# EAGLE board Light Sensor V3 (EAGLE 8.6.0)
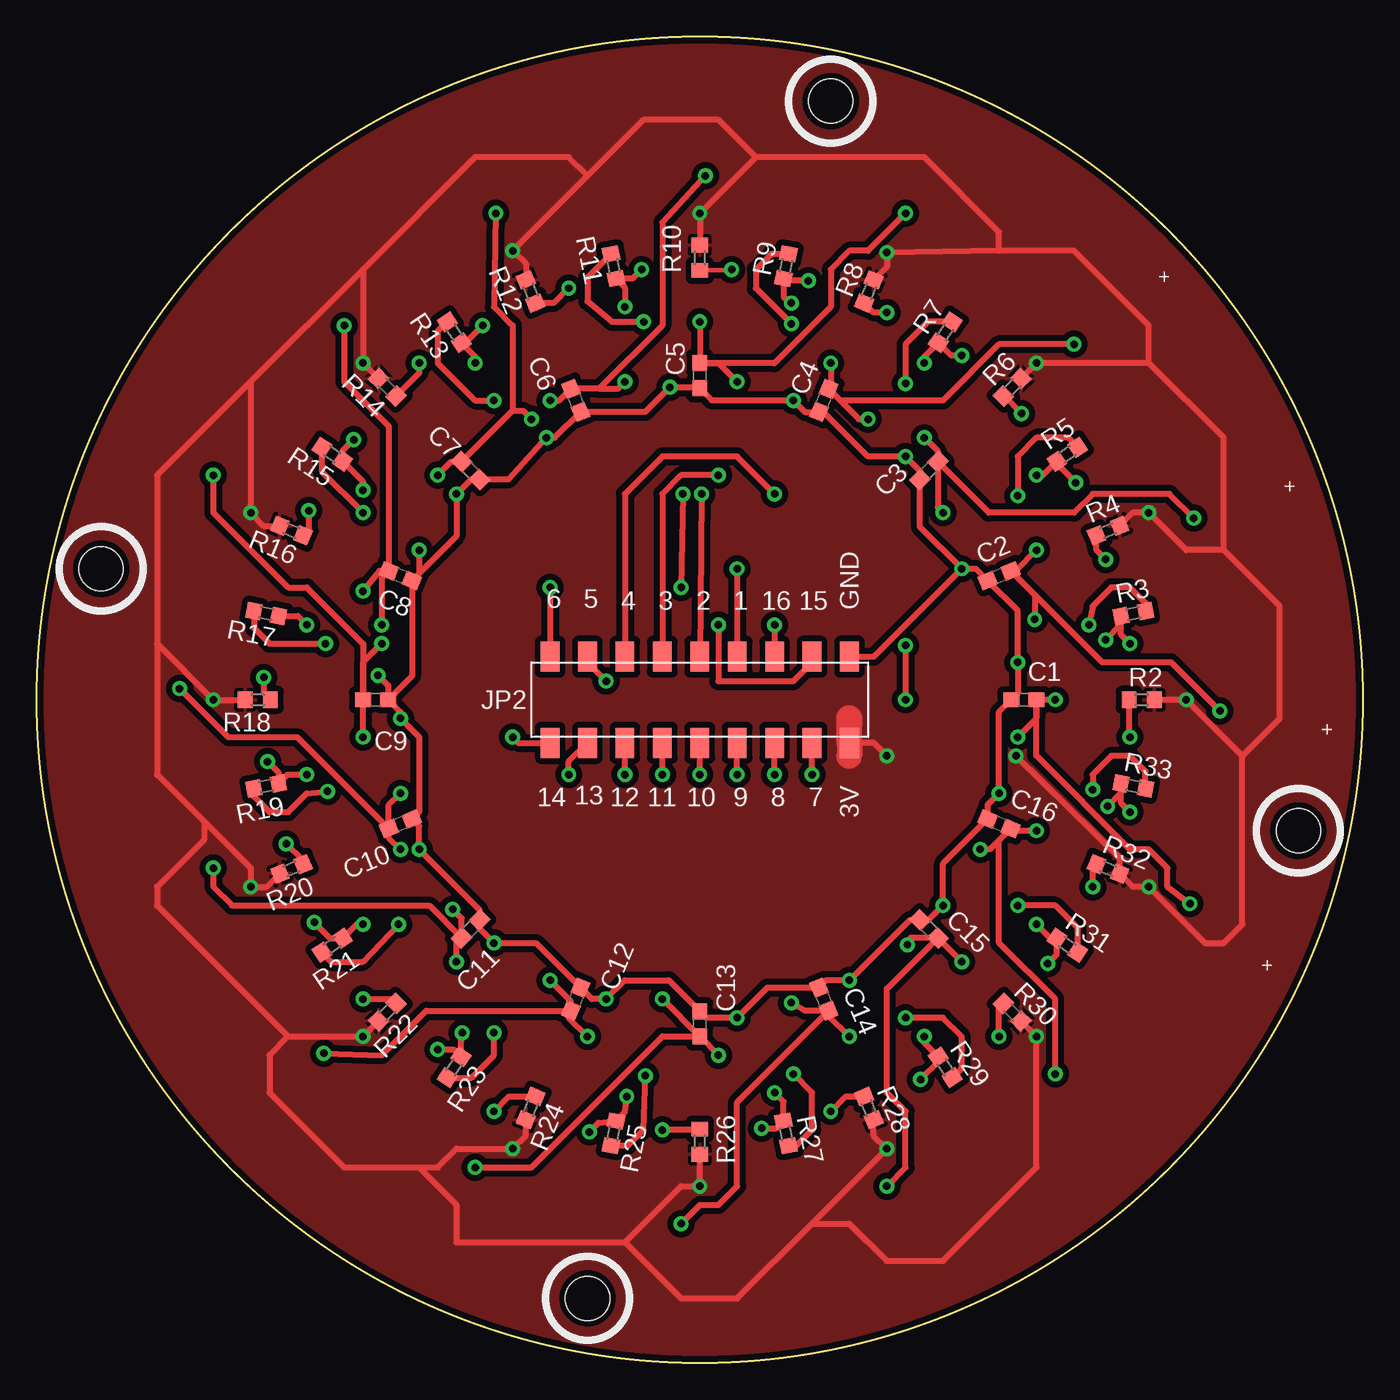
[diagram p0: board, top side]
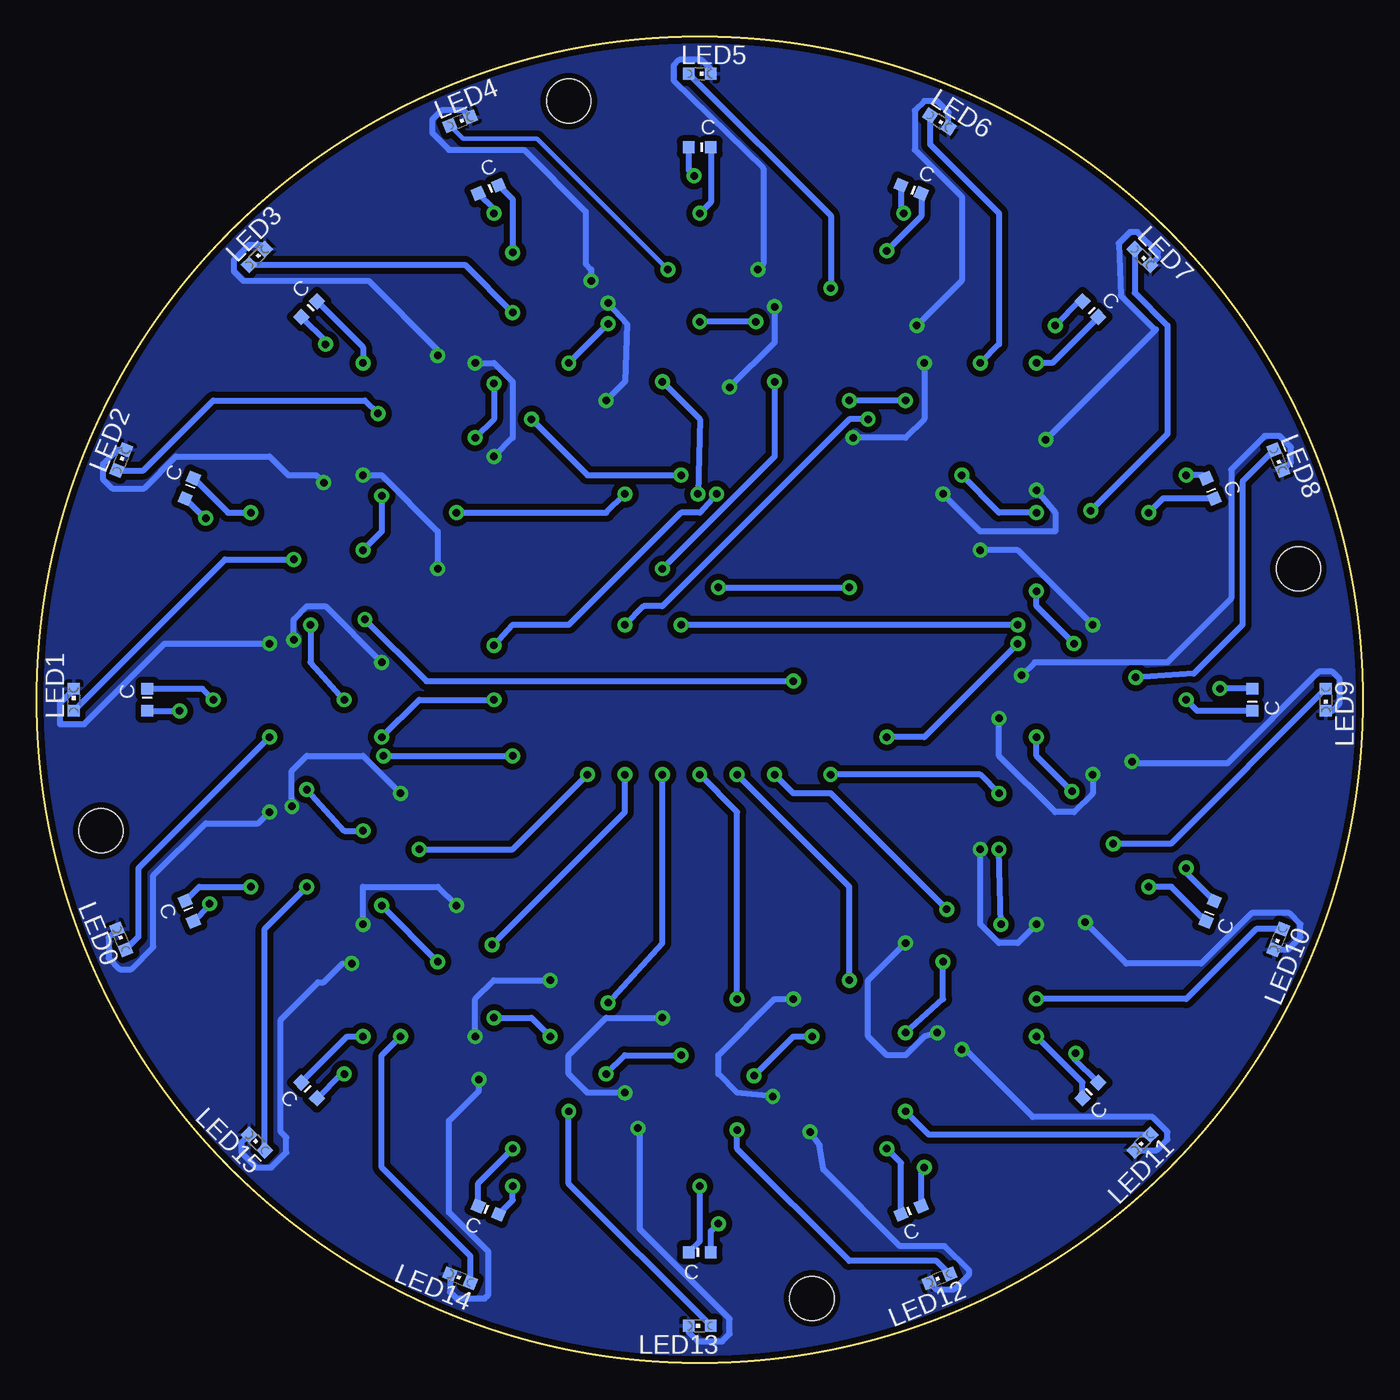
[diagram p1: board, bottom side, seen from below]

Size 90 x 90 mm. Coordinates in mm from the lower left corner, seen from the top.
Outline: circle at 45,45 radius 45
Copper layers (1*16): Top 0.035mm / dielectric 1.5mm / Bottom 0.035mm
Design rules "SparkFun": minimum track width 8mil, minimum drill 20mil, track to track 8mil, track to pad 8mil, pad to pad 8mil, via to via 8mil, smd to smd 8mil, copper to edge 10mil, drill to drill 8mil, minimum pad ring 12mil, minimum via ring 10mil, stop-mask expansion 4mil, vias tented up to drill 25mil, thermal gap 10mil
Holes 3 mm at 85.64,36.11 53.89,85.64 37.38,4.36 4.36,53.89

## Footprints (pad centres in the part's own frame; a part is rotated, then mirrored left to right if it is on the bottom)
C0603 = smd 1.1 x 1: 1 -0.85,0; 2 0.85,0
2X09_SMT = smd 1.27 x 2.032: 1 -10.16,-2.921; 2 -10.16,2.921; 3 -7.62,-2.921; 4 -7.62,2.921; 5 -5.08,-2.921; 6 -5.08,2.921; 7 -2.54,-2.921; 8 -2.54,2.921; 9 0,-2.921; 10 0,2.921; 11 2.54,-2.921; 12 2.54,2.921; 13 5.08,-2.921; 14 5.08,2.921; 15 7.62,-2.921; 16 7.62,2.921; 17 10.16,-2.921; 18 10.16,2.921
CHIPLED_0603 = smd 0.8 x 0.8: A 0,-0.75; C 0,0.75
SMD = smd 0.8 x 0.8: C -0.75,0; E 0.75,0
R0603 = smd 1 x 1.1: 1 -0.85,0; 2 0.85,0

## Placement (x,y rotation side)
C1  0.1uF  [C0603]  67,45 0 top
C2  0.1uF  [C0603]  65.33,53.42 22.5 top
C3  0.1uF  [C0603]  60.56,60.56 45 top
C4  0.1uF  [C0603]  53.42,65.33 67.5 top
C5  0.1uF  [C0603]  45,67 90 top
C6  0.1uF  [C0603]  36.58,65.33 112.5 top
C7  0.1uF  [C0603]  29.44,60.56 135 top
C8  0.1uF  [C0603]  24.67,53.42 157.5 top
C9  0.1uF  [C0603]  23,45 180 top
C10  0.1uF  [C0603]  24.67,36.58 202.5 top
C11  0.1uF  [C0603]  29.44,29.44 225 top
C12  0.1uF  [C0603]  36.58,24.67 247.5 top
C13  0.1uF  [C0603]  45,23 270 top
C14  0.1uF  [C0603]  53.42,24.67 292.5 top
C15  0.1uF  [C0603]  60.56,29.44 315 top
C16  0.1uF  [C0603]  65.33,36.58 337.5 top
JP2  [2X09_SMT]  45,45 0 top
LED0  [CHIPLED_0603]  84.26,28.74 22.5 bottom
LED1  [CHIPLED_0603]  87.5,45 0 bottom
LED2  [CHIPLED_0603]  84.26,61.26 337.5 bottom
LED3  [CHIPLED_0603]  75.05,75.05 315 bottom
LED4  [CHIPLED_0603]  61.26,84.26 292.5 bottom
LED5  [CHIPLED_0603]  45,87.5 270 bottom
LED6  [CHIPLED_0603]  28.74,84.26 237 bottom
LED7  [CHIPLED_0603]  14.95,75.05 224.5 bottom
LED8  [CHIPLED_0603]  5.74,61.26 202.5 bottom
LED9  [CHIPLED_0603]  2.5,45 180 bottom
LED10  [CHIPLED_0603]  5.74,28.74 157.5 bottom
LED11  [CHIPLED_0603]  14.95,14.95 135 bottom
LED12  [CHIPLED_0603]  28.74,5.74 112.5 bottom
LED13  [CHIPLED_0603]  45,2.5 90 bottom
LED14  [CHIPLED_0603]  61.26,5.74 67.5 bottom
LED15  [CHIPLED_0603]  75.05,14.95 45 bottom
LS0  ALS  [SMD]  79.65,30.65 292.5 bottom
LS1  ALS  [SMD]  82.5,45 270 bottom
LS2  ALS  [SMD]  79.65,59.35 247.5 bottom
LS3  ALS  [SMD]  71.52,71.52 225 bottom
LS4  ALS  [SMD]  59.35,79.65 202.5 bottom
LS5  ALS  [SMD]  45,82.5 180 bottom
LS6  ALS  [SMD]  30.65,79.65 157.5 bottom
LS7  ALS  [SMD]  18.48,71.52 135 bottom
LS8  ALS  [SMD]  10.35,59.35 112.5 bottom
LS9  ALS  [SMD]  7.5,45 90 bottom
LS10  ALS  [SMD]  10.35,30.65 67.5 bottom
LS11  ALS  [SMD]  18.48,18.48 45 bottom
LS12  ALS  [SMD]  30.65,10.35 22.5 bottom
LS13  ALS  [SMD]  45,7.5 0 bottom
LS14  ALS  [SMD]  59.35,10.35 337.5 bottom
LS15  ALS  [SMD]  71.52,18.48 315 bottom
R2  100  [R0603]  75,45 0 top
R3  33K  [R0603]  74.42,50.85 11.3 top
R4  100  [R0603]  72.72,56.48 22.5 top
R5  33K  [R0603]  69.94,61.67 33.8 top
R6  100  [R0603]  66.21,66.21 45 top
R7  33K  [R0603]  61.67,69.94 56.3 top
R8  100  [R0603]  56.48,72.72 67.5 top
R9  33K  [R0603]  50.85,74.42 78.8 top
R10  100  [R0603]  45,75 90 top
R11  33K  [R0603]  39.15,74.42 101.3 top
R12  100  [R0603]  33.52,72.72 112.5 top
R13  33K  [R0603]  28.33,69.94 123.8 top
R14  100  [R0603]  23.79,66.21 135 top
R15  33K  [R0603]  20.06,61.67 146.3 top
R16  100  [R0603]  17.28,56.48 157.5 top
R17  33K  [R0603]  15.58,50.85 168.8 top
R18  100  [R0603]  15,45 180 top
R19  33K  [R0603]  15.58,39.15 191.3 top
R20  100  [R0603]  17.28,33.52 202.5 top
R21  33K  [R0603]  20.06,28.33 213.8 top
R22  100  [R0603]  23.79,23.79 225 top
R23  33K  [R0603]  28.33,20.06 236.3 top
R24  100  [R0603]  33.52,17.28 247.5 top
R25  33K  [R0603]  39.15,15.58 258.8 top
R26  100  [R0603]  45,15 270 top
R27  33K  [R0603]  50.85,15.58 281.3 top
R28  100  [R0603]  56.48,17.28 292.5 top
R29  33K  [R0603]  61.67,20.06 303.8 top
R30  100  [R0603]  66.21,23.79 315 top
R31  33K  [R0603]  69.94,28.33 326.3 top
R32  100  [R0603]  72.72,33.52 337.5 top
R33  33K  [R0603]  74.42,39.15 348.8 top

## Library data of the parts
C1-C16 LED0 LED1-LED15 R2-R33 = adafruit
JP2 = PinHead+
LS0 LS1-LS15 = phototransitor-ALS-PT19-315CL177TR8

## Nets
+3V3: JP2.17 LS0.C LS1.C LS2.C LS3.C LS4.C LS5.C LS6.C LS7.C LS8.C LS9.C LS10.C LS11.C LS12.C LS13.C LS14.C LS15.C R2.2 R4.2 R6.2 R8.2 R10.2 R12.2 R14.2 R16.2 R18.2 R20.2 R22.2 R24.2 R26.2 R28.2 R30.2 R32.2
GND: C1.1 C2.1 C3.1 C4.1 C5.1 C6.1 C7.1 C8.1 C9.1 C10.1 C11.1 C12.1 C13.1 C14.1 C15.1 C16.1 JP2.18 LED0.C LED1.C LED2.C LED3.C LED4.C LED5.C LED6.C LED7.C LED8.C LED9.C LED10.C LED11.C LED12.C LED13.C LED14.C LED15.C R3.1 R5.1 R7.1 R9.1 R11.1 R13.1 R15.1 R17.1 R19.1 R21.1 R23.1 R25.1 R27.1 R29.1 R31.1 R33.1
LS0: C1.2 JP2.2 LS0.E R3.2
LS1: C2.2 JP2.4 LS1.E R5.2
LS2: C3.2 JP2.6 LS2.E R7.2
LS3: C4.2 JP2.8 LS3.E R9.2
LS4: C5.2 JP2.10 LS4.E R11.2
LS5: C6.2 JP2.12 LS5.E R13.2
LS6: C7.2 JP2.14 LS6.E R15.2
LS7: C8.2 JP2.16 LS7.E R17.2
LS8: C9.2 JP2.1 LS8.E R19.2
LS9: C10.2 JP2.3 LS9.E R21.2
LS10: C11.2 JP2.5 LS10.E R23.2
LS11: C12.2 JP2.7 LS11.E R25.2
LS12: C13.2 JP2.9 LS12.E R27.2
LS13: C14.2 JP2.11 LS13.E R29.2
LS14: C15.2 JP2.13 LS14.E R31.2
LS15: C16.2 JP2.15 LS15.E R33.2
N$1: LED0.A R2.1
N$2: LED1.A R4.1
N$3: LED2.A R6.1
N$4: LED3.A R8.1
N$5: LED4.A R10.1
N$6: LED5.A R12.1
N$7: LED6.A R14.1
N$8: LED7.A R16.1
N$9: LED8.A R18.1
N$10: LED9.A R20.1
N$11: LED10.A R22.1
N$12: LED11.A R24.1
N$13: LED12.A R26.1
N$14: LED13.A R28.1
N$15: LED14.A R30.1
N$16: LED15.A R32.1

## Tracks (layer width: path | path; a pad name or v marks a point on that pad's centre or on a via)
+3V3  (via drill 0.51)
  Top 0.406: R10.2 v45,78.02 48.81,81.83 | R8.2 57.7,74.4 v57.7,75.35 65.32,75.48 | R6.2 v67.86,67.86 75.48,67.86 | R4.2 74.4,57.7 v75.48,57.7 78.02,55.16 80.56,55.16 | R2.2 v78.02,45 81.83,41.19 | R30.2 v67.86,22.14 67.86,13.25 61.51,6.9 57.7,6.9 55.16,9.44 52.62,9.44 | R28.2 56.81,15.41 v57.7,14.52 52.62,9.44 | R26.2 v45,11.98 43.73,11.98 39.92,8.17 | R24.2 33.19,15.41 v32.3,14.52 28.49,14.52 27.22,13.25 25.95,13.25 | R22.2 v22.14,22.14 17.06,22.14 | R20.2 15.6,32.3 v14.52,32.3 14.52,33.57 11.34,36.74 | R18.2 v11.98,45 8.17,48.81 | R16.2 15.41,56.81 v14.52,57.7 14.52,66.59 | R14.2 v22.14,67.86 22.14,74.21 | R12.2 33.19,74.59 v32.3,75.48 37.38,80.56 | v57.7,41.19 56.81,42.08 JP2.17 | v66.46,41.19 73.5,34.28 R32.2 74.4,32.3 v75.48,32.3 79.29,28.49 80.56,28.49 81.83,29.76 81.83,41.19 | 81.83,41.19 84.37,43.73 84.37,51.35 80.56,55.16 | 80.56,55.16 80.56,62.78 75.48,67.86 | 75.48,67.86 75.48,70.4 70.4,75.48 65.32,75.48 | 65.32,75.48 65.32,76.75 60.24,81.83 48.81,81.83 | 48.81,81.83 46.27,84.37 41.19,84.37 37.38,80.56 | 37.38,80.56 36.11,81.83 29.76,81.83 22.14,74.21 | 22.14,74.21 14.52,66.59 | 14.52,66.59 8.17,60.24 8.17,48.81 | 8.17,48.81 8.17,39.92 11.34,36.74 | 11.34,36.74 11.34,35.48 8.17,32.3 8.17,31.03 17.06,22.14 | 17.06,22.14 15.79,20.87 15.79,18.33 20.87,13.25 25.95,13.25 | 25.95,13.25 28.49,10.71 28.49,8.17 39.92,8.17 | 39.92,8.17 43.73,4.36 47.54,4.36 52.62,9.44
  Top 1.778: 55.16,41.19 JP2.17 55.16,43.73
  Bottom 0.406: LS5.C 44.25,78.77 v45,78.02 | LS4.C 57.7,78.97 v57.7,75.35 | LS3.C 67.86,68.92 v67.86,67.86 | LS2.C 77.02,57.7 v75.48,57.7 | LS1.C 78.77,45.75 v78.02,45 | LS0.C 78.97,32.3 v75.48,32.3 | LS15.C 68.92,22.14 v67.86,22.14 | LS14.C 60.04,12.18 v57.7,14.52 | LS13.C 45,8.25 v45,11.98 | LS12.C 31.34,13.56 v32.3,14.52 | LS11.C 19.01,19.01 v22.14,22.14 | LS10.C 12.98,32.3 v14.52,32.3 | LS9.C 11.23,44.25 v11.98,45 | LS8.C 13.56,58.66 v14.52,57.7 | LS7.C 21.08,67.86 v22.14,67.86 | LS6.C 29.96,77.82 v32.3,75.48 | v66.46,41.19 v57.7,41.19
  pour Top (isolate 0.406): -13.42,90.72 -13.42,29.76 15.79,0.55 31.03,0.55 33.57,-1.99 67.86,-1.99 99.61,29.76 99.61,62.78 72.94,89.45 71.67,90.72
GND  (via drill 0.51)
  Top 0.305: 69.24,61.02 R5.1 | 50.83,73.45 R9.1 | 29.11,69.24 R13.1
  Top 0.406: v74.21,48.81 73.59,49.43 R3.1 73.59,50.09 v72.56,49.06 | v70.53,59.73 69.24,61.02 | v62.78,68.37 62.06,68.37 R7.1 60.24,68.28 v60.24,67.86 | v52.37,73.45 50.83,73.45 | v41.06,74.21 40.44,73.59 R11.1 39.92,72.98 v39.92,71.67 | v30.27,70.4 29.11,69.24 | v21.5,62.65 20.76,61.91 R15.1 22.14,59.82 v22.14,59.22 | v23.16,46.65 23.85,45.96 C9.1 | v15.66,40.81 16.41,40.06 R19.1 17.02,39.92 v18.33,39.92 | v18.84,29.89 19.92,28.81 R21.1 21.72,29.76 v22.14,29.76 | v27.22,21.25 28.32,21.25 R23.1 28.8,21.82 v28.87,22.39 | v37.51,15.66 38.13,16.28 R25.1 39.92,17.02 v40.05,18.08 | v49.19,15.92 50.19,15.92 R27.1 50.69,17.72 v50.08,18.33 | v59.99,19.22 61.19,20.43 R29.1 60.24,21.72 v60.24,22.14 | v68.62,27.09 69.24,27.71 R31.1 68.81,28.8 v67.86,29.76 | v74.21,37.38 73.59,38 R33.1 73.59,38.66 v72.69,37.76 | R9.1 50.69,72.33 v51.22,71.92 | R5.1 68.28,60.24 v67.86,60.24 | v62.78,53.89 63.74,53.89 C2.1 66.59,51.04 v66.59,47.54 66.59,45.44 C1.1 65.32,44.17 v65.32,38.65 64.54,37.87 C16.1 61.51,33.88 v61.51,31.03 60.52,30.05 C15.1 59.26,30.05 v55.16,25.95 53.58,25.95 C14.1 49.59,25.46 v47.54,23.41 45.44,23.41 C13.1 42.9,25.95 39.92,25.95 v38.65,24.68 37.69,24.68 C12.1 33.88,28.49 v31.03,28.49 30.05,29.48 C11.1 30.05,30.74 v25.95,34.84 25.95,36.42 C10.1 25.95,37.4 25.95,42.46 v24.68,43.73 24.68,44.17 C9.1 | v62.78,53.89 59.95,56.72 C3.1 59.95,60.52 v58.97,61.51 56.43,61.51 53.4,64.54 C4.1 52.13,64.54 v51.35,65.32 45.83,65.32 C5.1 44.94,66.21 v42.97,66.21 41.3,64.54 C6.1 35.15,62.78 v34.59,62.78 32.02,59.95 C7.1 29.48,59.95 v28.49,58.97 28.49,56.12 C8.1 | JP2.18 56.81,47.92 v62.78,53.89
  Top 0.406: R17.1 17.72,50.69 v18.33,50.08 | C8.1 25.95,53.58 v25.95,55.16 | C8.1 25.46,46.61 C9.1 | R13.1 29.76,68.28 v29.76,67.86
  Bottom 0.305: LED1.C 87.5,45.68 | 75.61,75.86 75.73,75.86 | LED5.C 44.25,87.81 | 13.89,75.05 13.89,75.35 | 14.14,70.15 14.01,70.15 | LED8.C 5.43,60.57 | 15.54,40.68 v15.66,40.81
  Bottom 0.406: v74.21,48.81 81.32,48.81 86.78,43.35 88.43,43.35 88.43,44.75 87.5,45.68 | LED2.C 84.56,61.96 85.51,61 85.51,59.99 84.88,59.35 82.72,59.35 80.56,61.51 74.21,61.51 72.94,60.24 71.03,60.24 v70.53,59.73 | LED3.C 74.8,75.86 75.61,75.86 76.62,74.84 76.62,74.08 75.99,73.45 67.48,73.45 62.78,68.75 v62.78,68.37 | LED4.C 61.02,85 62.53,85 63.16,84.37 63.16,83.48 62.02,82.34 56.94,82.34 52.75,78.15 52.75,74.59 52.37,74.21 v52.37,73.45 | 44.25,87.81 44.87,88.43 46.4,88.43 46.78,88.05 46.78,87.04 40.68,81.07 40.68,74.59 v41.06,74.21 | LED6.C 28.11,84.88 28.87,85.64 29.76,85.64 30.39,85 30.39,82.34 27.22,79.16 27.22,73.45 v30.27,70.4 | LED7.C 13.89,75.05 | 13.89,75.35 15.28,76.75 15.79,76.75 16.55,75.99 16.43,72.43 14.14,70.15 | 14.01,70.15 v21.5,62.65 | 5.43,60.57 4.87,61.13 4.87,62.14 5.63,62.91 6.65,62.91 8.93,60.62 8.93,51.86 13.25,47.54 22.27,47.54 v23.16,46.65 | LED9.C 2.06,44.25 1.57,44.75 1.57,46.4 2.07,46.91 2.96,46.91 9.19,40.68 15.54,40.68 | LED10.C 5.06,28.04 4.23,28.87 4.23,29.76 4.99,30.52 7.53,30.52 10.96,27.09 16.04,27.09 v18.84,29.89 | LED11.C 13.99,14.42 13.25,15.16 13.25,15.66 14.27,16.68 22.39,16.68 26.97,21.25 v27.22,21.25 | LED12.C 28.98,4.99 27.73,4.99 26.71,6.01 26.71,6.27 28.36,7.92 31.41,7.92 36.62,13.12 36.87,14.77 v37.51,15.66 | LED13.C 45.75,2.06 45.13,1.44 43.48,1.44 42.97,1.95 42.97,2.96 49.06,9.06 49.06,15.79 v49.19,15.92 | LED14.C 61.96,4.81 61.51,4.36 59.61,4.36 59.35,4.61 59.35,7.53 62.02,10.2 62.02,16.43 59.99,18.46 v59.99,19.22 | LED15.C 76.11,14.95 76.11,14.27 75.1,13.25 74.08,13.25 73.07,14.27 73.07,15.28 73.45,15.66 73.45,23.28 70.91,25.82 70.53,25.82 69.26,27.09 v68.62,27.09
  Bottom 0.406: LED0.C 85.13,28.85 85.13,27.47 84.37,26.71 83.61,26.71 82.08,28.24 82.08,33.06 78.53,36.62 74.97,36.62 v74.21,37.38 | v39.92,71.67 39.92,69.26 v42.97,66.21 | v51.22,71.92 49.95,70.53 50.08,66.59 v51.35,65.32 | v60.24,67.86 58.97,67.86 57.7,66.59 57.7,62.78 v58.97,61.51 | v67.86,60.24 66.59,60.24 62.78,56.43 v62.78,53.89 | v72.56,49.06 72.56,50.46 71.67,51.35 70.4,51.35 v66.59,47.54 | v72.69,37.76 72.69,40.17 71.67,41.19 67.86,41.19 v65.32,38.65 | v67.86,29.76 67.86,32.3 62.78,32.3 v61.51,31.03 | v60.24,22.14 60.24,24.68 58.97,25.95 v55.16,25.95 | v50.08,18.33 52.62,18.33 53.89,19.6 53.89,20.87 51.35,23.41 v47.54,23.41 | v40.05,18.08 42.46,18.33 43.73,19.6 43.73,20.87 39.92,24.68 v38.65,24.68 | v28.87,22.39 29.76,22.14 31.03,20.87 32.3,20.87 33.57,22.14 33.57,25.95 v31.03,28.49 | v22.14,29.76 23.41,28.49 24.68,28.49 25.95,29.76 v25.95,34.84 | v18.33,39.92 18.33,38.65 19.6,37.38 20.87,37.38 24.68,41.19 v24.68,43.73 | v18.33,50.08 23.41,55.16 v25.95,55.16 | v22.14,59.22 20.87,57.7 20.87,56.43 25.95,56.43 v28.49,58.97 | v34.59,62.78 31.03,62.78 29.76,64.05 v29.76,67.86
  pour Bottom (isolate 0.406): 0.55,91.99 66.59,91.99 91.99,66.59 91.99,4.36 85.64,-1.99 8.17,-1.99 -0.72,6.9 -0.72,67.86 -0.72,90.72
LS0  (via drill 0.51)
  Top 0.406: v78.27,31.16 76.75,32.3 76.75,33.57 75.48,34.84 74.21,34.84 67.85,41.2 C1.2 | R3.2 75.26,51.57 74.21,52.62 72.94,52.62 71.67,51.35 v71.42,50.08 | v69.13,45 C1.2 | C1.2 67.85,43.72 v66.59,42.46 | v34.84,52.62 JP2.2 | v43.86,58.97 v43.73,52.62 | v58.97,48.68 v58.97,45
  Bottom 0.406: LS0.E 78.28,31.03 v78.27,31.16 | v71.42,50.08 71.42,47.54 v69.13,45 | v66.59,42.46 64.05,45 v58.97,45 | v43.86,58.97 45,57.7 46.27,57.7 53.89,50.08 57.7,50.08 v58.97,48.68 | v43.73,52.62 v34.84,52.62
LS1  (via drill 0.51)
  Top 0.406: v80.31,44.24 77,47.54 72.31,47.54 C2.2 | R5.2 70.01,62.78 67.86,62.78 66.59,61.51 v66.59,58.84 | v67.86,55.16 66.44,53.74 C2.2 | C2.2 67.73,52.12 v67.73,50.46 | v38.65,46.27 37.38,47.54 JP2.4
  Bottom 0.406: LS1.E v80.32,44.25 v80.31,44.24 | v66.59,58.84 66.59,56.43 v67.86,55.16 | v67.73,50.46 63.54,46.27 v38.65,46.27
LS2  (via drill 0.51)
  Top 0.406: v78.53,57.32 76.88,58.97 71.67,58.97 70.4,57.7 64.61,57.7 C3.2 | R7.2 60.49,70.65 58.97,69.13 v58.97,66.46 | v60.24,62.78 61.16,61.86 C3.2 | C3.2 61.16,58.05 v61.51,57.7 | v50.08,58.97 47.54,61.51 42.46,61.51 39.92,58.97 JP2.6
  Bottom 0.406: LS2.E 78.59,57.32 v78.53,57.32 | v58.97,66.46 58.97,64.05 v60.24,62.78 | v61.51,57.7 51.35,57.7 v50.08,58.97
LS3  (via drill 0.51)
  Top 0.406: 54.53,65.32 61.51,65.32 65.32,69.13 v70.4,69.13 | 54.53,65.32 C4.2 53.89,66.26 v53.89,67.86 | R9.2 49.86,75.26 48.81,74.21 48.81,72.94 v51.22,70.53 | 54.53,65.32 55.8,64.05 v56.43,64.05 | v46.27,60.24 43.73,60.24 42.46,58.97 JP2.8
  Bottom 0.406: LS3.E 70.4,69.34 v70.4,69.13 | v51.22,70.53 v53.89,67.86 | v56.43,64.05 52.62,60.24 v46.27,60.24
LS4  (via drill 0.51)
  Top 0.406: v58.97,78.02 56.43,75.48 55.16,75.48 53.89,74.21 53.89,71.67 50.07,67.85 C5.2 | R11.2 37.38,73.66 37.38,72.05 39.03,70.65 v41.19,70.65 | v45,70.65 C5.2 | C5.2 46.28,67.85 v47.54,66.59 | v45.13,58.97 JP2.10
  Bottom 0.406: LS4.E 58.97,78.28 v58.97,78.02 | v41.19,70.65 v45,70.65 | v47.54,66.59 45,64.05 v45.13,58.97
LS5  (via drill 0.51)
  Top 0.406: v45.38,80.56 42.46,77.38 42.46,70.4 38.17,66.11 | 38.17,66.11 C6.2 35.47,65.32 v34.84,65.32 | R13.2 27.22,70.01 27.22,67.86 29.76,65.32 v31.03,65.32 | 38.17,66.11 39.44,66.11 v39.92,66.59 | v47.54,53.89 JP2.12
  Bottom 0.406: LS5.E 45.75,80.93 v45.38,80.56 | v31.03,65.32 v34.84,65.32 | v39.92,66.59 39.92,61.51 v47.54,53.89
LS6  (via drill 0.51)
  Top 0.406: 32.3,64.61 32.3,70.4 31.03,71.67 v31.16,78.02 | 32.3,64.61 C7.2 28.14,61.16 v27.22,60.24 | R15.2 19.35,60.49 v22.14,57.7 | 32.3,64.61 33.01,64.61 v33.57,64.05 | v50.08,50.08 JP2.14
  Bottom 0.406: LS6.E 31.34,78.33 v31.16,78.02 | v22.14,57.7 24.68,57.7 v27.22,60.24 | v33.57,64.05 34.84,64.05 47.54,51.35 48.81,51.35 v50.08,50.08
LS7  (via drill 0.51)
  Top 0.406: v20.87,70.4 20.87,66.59 23.89,63.57 C8.2 | R17.2 14.74,49.86 15.79,48.81 v19.6,48.81 | v22.14,52.37 23.26,53.74 C8.2 | C8.2 23.41,53.27 v23.41,50.08 | v46.27,50.08 46.27,46.27 51.35,46.27 52.62,47.54 JP2.16
  Bottom 0.406: LS7.E 19.22,72.05 v20.87,70.4 | v19.6,48.81 22.14,51.35 v22.14,52.37 | v23.41,50.08 v46.27,50.08
LS8  (via drill 0.51)
  Top 0.406: v11.98,60.24 11.98,57.7 17.06,52.62 18.33,52.62 22.15,48.8 C9.2 | R19.2 14.74,38.43 15.79,37.38 17.06,37.38 18.33,38.65 v19.73,38.78 | v22.14,42.46 C9.2 | C9.2 22.15,47.55 v23.41,48.81 | v32.3,42.46 32.68,42.08 JP2.1
  Bottom 0.406: LS8.E 10.84,60.24 v11.98,60.24 | v19.73,38.78 22.14,41.19 v22.14,42.46 | v23.41,48.81 29.76,42.46 v32.3,42.46
LS9  (via drill 0.51)
  Top 0.406: v9.69,45.76 13,42.46 17.68,42.46 C10.2 | R21.2 19.99,27.22 22.14,27.22 v24.55,29.76 | v24.68,34.84 23.89,35.63 C10.2 | C10.2 23.89,37.86 v24.68,38.65 | v36.11,39.92 36.11,40.81 JP2.3
  Bottom 0.406: LS9.E v9.68,45.75 v9.69,45.76 | v24.55,29.76 v24.68,34.84 | v24.68,38.65 25.95,39.92 v36.11,39.92
LS10  (via drill 0.51)
  Top 0.406: v11.98,33.57 11.98,32.3 13.25,31.03 26.66,31.03 C11.2 | R23.2 29.51,19.35 31.03,20.87 v31.03,22.39 | v28.49,27.22 28.49,28.49 C11.2 | C11.2 28.84,30.17 v28.24,30.78 | v39.92,39.92 JP2.5
  Bottom 0.406: LS10.E 11.98,33.26 v11.98,33.57 | v31.03,22.39 28.49,24.68 v28.49,27.22 | v28.24,30.78 36.11,38.65 38.65,38.65 v39.92,39.92
LS11  (via drill 0.51)
  Top 0.406: v19.47,21 23.41,20.87 26.43,23.89 36.11,23.89 | 36.11,23.89 C12.2 36.26,24.53 v34.84,25.95 | R25.2 40.14,14.74 41.19,15.79 v41.32,19.47 | v37.38,22.14 36.11,23.41 36.11,23.89 | v42.46,39.92 JP2.7
  Bottom 0.406: LS11.E 19.6,20.66 v19.47,21 | v41.32,19.47 38.65,22.14 v37.38,22.14 | v34.84,25.95 34.84,32.3 v42.46,39.92
LS12  (via drill 0.51)
  Top 0.406: v29.76,13.25 33.57,13.25 42.47,22.15 C13.2 | R27.2 51.57,14.74 52.62,15.79 52.62,18.33 v51.35,19.6 | v46.27,20.87 C13.2 | C13.2 v42.46,24.68 | v45,39.92 JP2.9
  Bottom 0.406: LS12.E 29.96,13.05 v29.76,13.25 | v51.35,19.6 50.08,20.87 v46.27,20.87 | v42.46,24.68 42.46,37.38 v45,39.92
LS13  (via drill 0.51)
  Top 0.406: v43.73,9.44 45,10.71 46.27,10.71 47.54,11.98 47.54,17.68 C14.2 | R29.2 62.78,19.99 62.78,22.14 61.51,23.41 v58.97,23.41 | v55.16,22.14 53.74,23.56 C14.2 | C14.2 52.14,23.89 v51.22,24.43 | v47.54,39.92 JP2.11
  Bottom 0.406: LS13.E 44.25,8.92 v43.73,9.44 | v58.97,23.41 56.43,23.41 v55.16,22.14 | v51.22,24.43 47.54,28.49 v47.54,39.92
LS14  (via drill 0.51)
  Top 0.406: v57.7,11.98 58.97,13.25 58.97,17.06 57.7,18.33 57.7,25.39 C15.2 | R31.2 70.65,29.51 69.13,31.03 v66.59,31.03 | v62.78,27.22 C15.2 | C15.2 59.32,28.84 v59.1,28.36 | v50.08,39.92 JP2.13
  Bottom 0.406: LS14.E 57.7,11.02 v57.7,11.98 | v66.59,31.03 v62.78,27.22 | v59.1,28.36 50.08,37.38 v50.08,39.92
LS15  (via drill 0.51)
  Top 0.406: C16.2 65.32,35.47 65.32,28.49 69.13,24.68 v69.13,19.6 | R33.2 75.26,40.14 74.21,41.19 72.94,41.19 71.67,39.92 v71.67,38.9 | v67.86,36.11 66.26,36.11 C16.2 | C16.2 64.69,34.84 v64.05,34.84 | v52.62,39.92 JP2.15
  Bottom 0.406: LS15.E 69.34,19.6 v69.13,19.6 | v71.67,38.9 69.13,36.11 v67.86,36.11 | v64.05,34.84 57.7,34.84 v52.62,39.92
N$1  (via drill 0.51)
  Top 0.305: v74.21,42.46 74.15,42.52
  Top 0.406: 74.15,42.52 R2.1
  Bottom 0.406: LED0.A 83.1,28.92 83.1,33.57 v74.21,42.46
N$2  (via drill 0.51)
  Top 0.406: v72.56,54.52 71.93,55.15 R4.1
  Bottom 0.406: LED1.A 77.22,54.52 v72.56,54.52
N$3  (via drill 0.51)
  Top 0.305: 65.66,65.61 R6.1
  Top 0.406: v66.84,64.43 65.66,65.61
  Bottom 0.406: LED2.A 82.77,60.57 78.02,65.32 67.73,65.32 v66.84,64.43
N$4  (via drill 0.51)
  Top 0.406: v57.7,71.29 56.8,71.29 R8.1
  Bottom 0.406: LED3.A 60.93,74.52 v57.7,71.29
N$5  (via drill 0.51)
  Top 0.305: v47.16,74.21 47.1,74.15 R10.1
  Bottom 0.305: LED4.A 61.08,83.1 56.05,83.1 v47.16,74.21
N$6  (via drill 0.51)
  Top 0.406: v36.11,72.94 35.1,71.93 R12.1
  Bottom 0.406: LED5.A 36.11,77.86 v36.11,72.94
N$7  (via drill 0.51)
  Top 0.406: v25.95,67.86 25.95,67.17 R14.1
  Bottom 0.406: LED6.A 29.37,82.7 24.68,78.02 24.68,69.13 v25.95,67.86
N$8  (via drill 0.51)
  Top 0.305: 18.46,56.54 R16.1
  Top 0.406: v18.46,57.83 18.46,56.54
  Bottom 0.406: LED7.A 15.47,72.62 13.25,70.4 13.25,63.03 v18.46,57.83
N$9  (via drill 0.51)
  Top 0.305: 15.41,45.44 R18.1
  Top 0.406: v15.41,46.52 15.41,45.44
  Bottom 0.406: LED8.A 8.17,59.81 8.17,50.08 11.47,46.78 v15.41,46.52
N$10  (via drill 0.51)
  Top 0.305: 18.07,34.09 R20.1
  Top 0.406: v16.93,35.22 18.07,34.09
  Bottom 0.406: LED9.A 13.03,35.22 v16.93,35.22
N$11  (via drill 0.51)
  Top 0.305: 24.1,24.68 R22.1
  Top 0.406: v22.14,24.68 24.1,24.68
  Bottom 0.406: LED10.A 7.23,29.43 11.98,24.68 v22.14,24.68
N$12  (via drill 0.51)
  Top 0.406: v31.03,17.06 32.04,18.07 R24.1
  Bottom 0.406: LED11.A 29.45,15.48 v31.03,17.06
N$13  (via drill 0.51)
  Top 0.305: v42.46,15.79 42.52,15.85
  Top 0.406: 42.52,15.85 R26.1
  Bottom 0.406: LED12.A 28.92,6.9 34.84,6.9 42.46,14.52 v42.46,15.79
N$14  (via drill 0.51)
  Top 0.406: v53.89,17.06 54.9,18.07 R28.1
  Bottom 0.406: LED13.A 53.89,12.14 v53.89,17.06
N$15  (via drill 0.51)
  Top 0.406: v65.32,22.14 65.32,24.1 R30.1
  Bottom 0.406: LED14.A 60.57,7.23 66.59,13.25 66.59,20.87 v65.32,22.14
N$16  (via drill 0.51)
  Top 0.305: 71.67,33.58 R32.1
  Top 0.406: v71.67,32.3 71.67,33.58
  Bottom 0.406: LED15.A 74.52,29.45 v71.67,32.3

## Text on the board
tPlace: + | + | 6 | 5 | 4 | 3 | 2 | 1 | 16 | 15 | GND | + | 14 | 13 | 12 | 11 | 10 | 9 | 8 | 7 | 3V | +